# Altium PCB FreidoraAireCukiDigLeds.PcbDoc
Units mil, origin at the board's own origin, x right, y up, seen from the top; angles counter-clockwise.
Board outline 3650 x 2850 mil, 2 copper layers (Top Layer, Bottom Layer); 51 components, 96 nets, 153 pads, 12 vias.
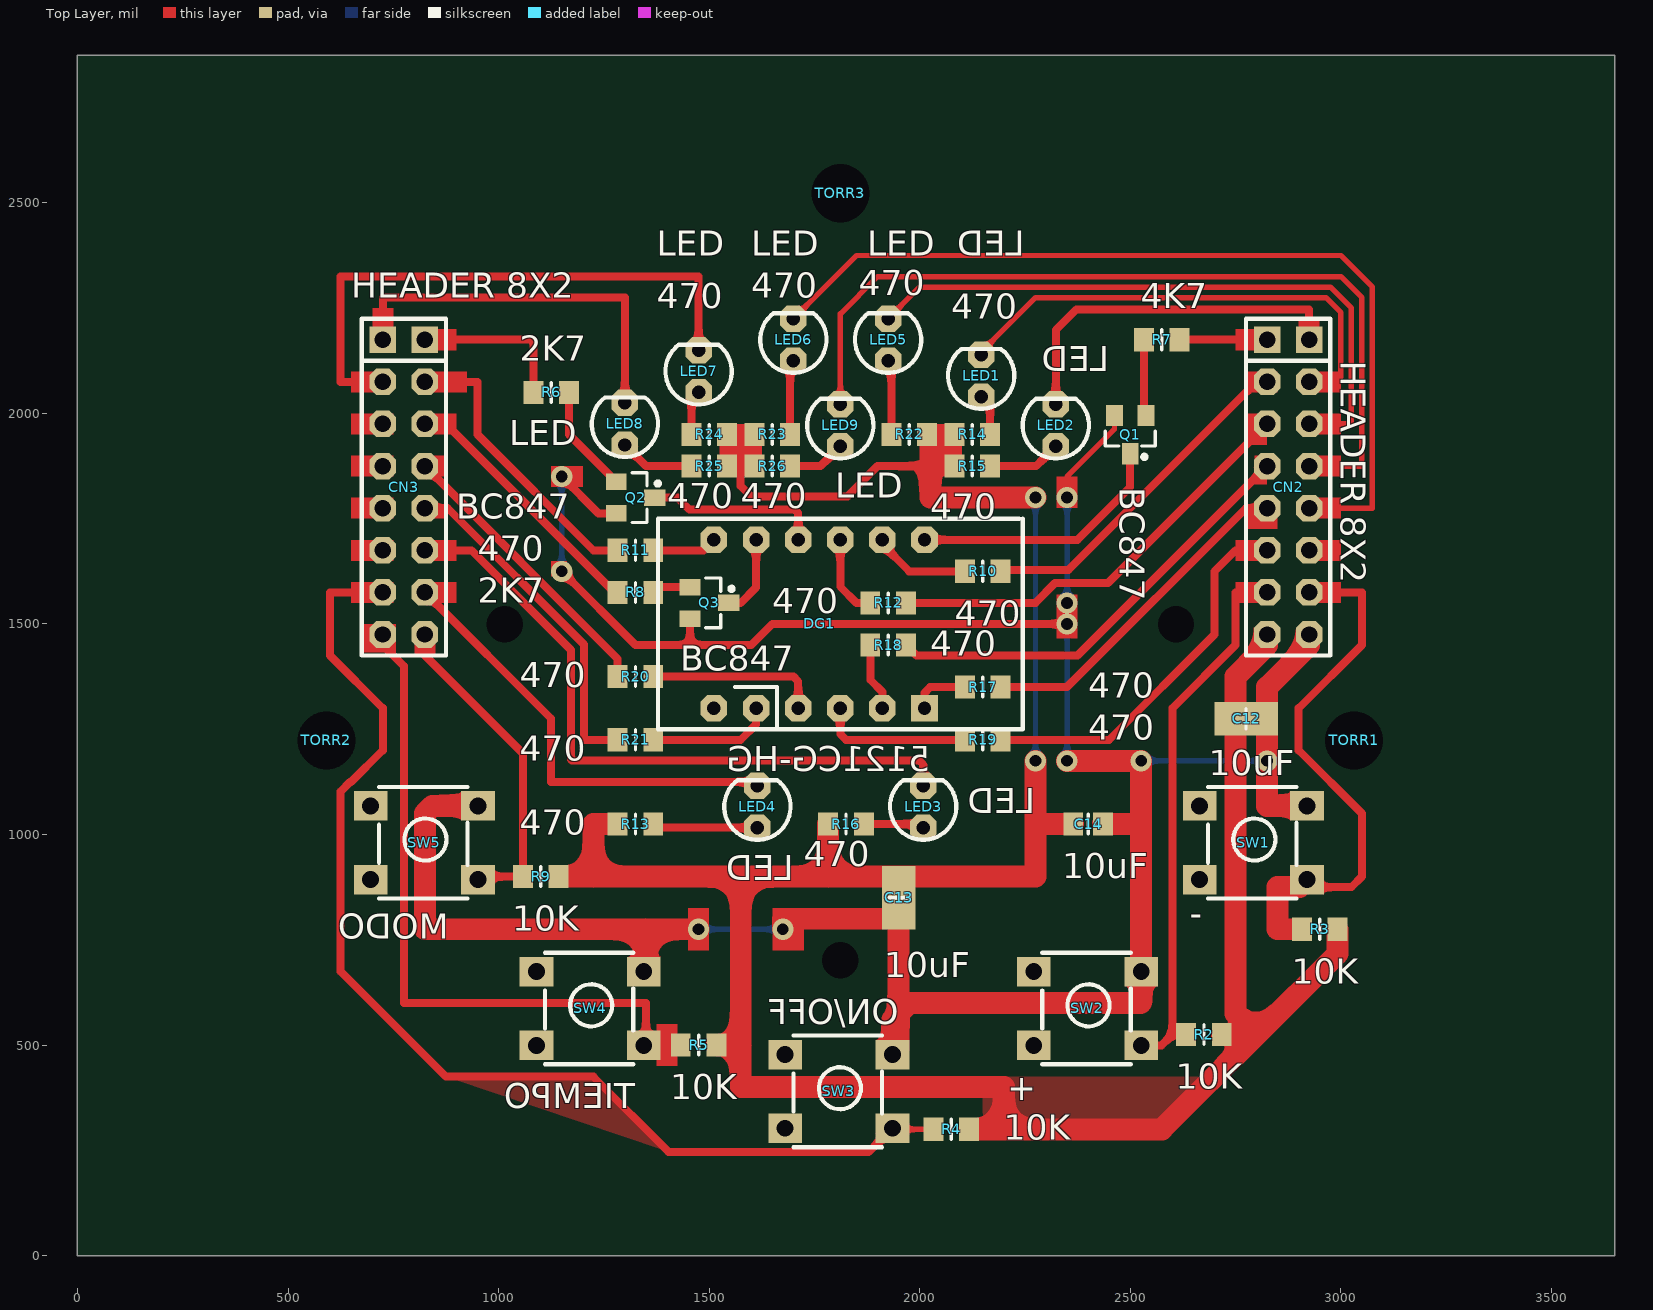
[diagram p0: Top Layer view]
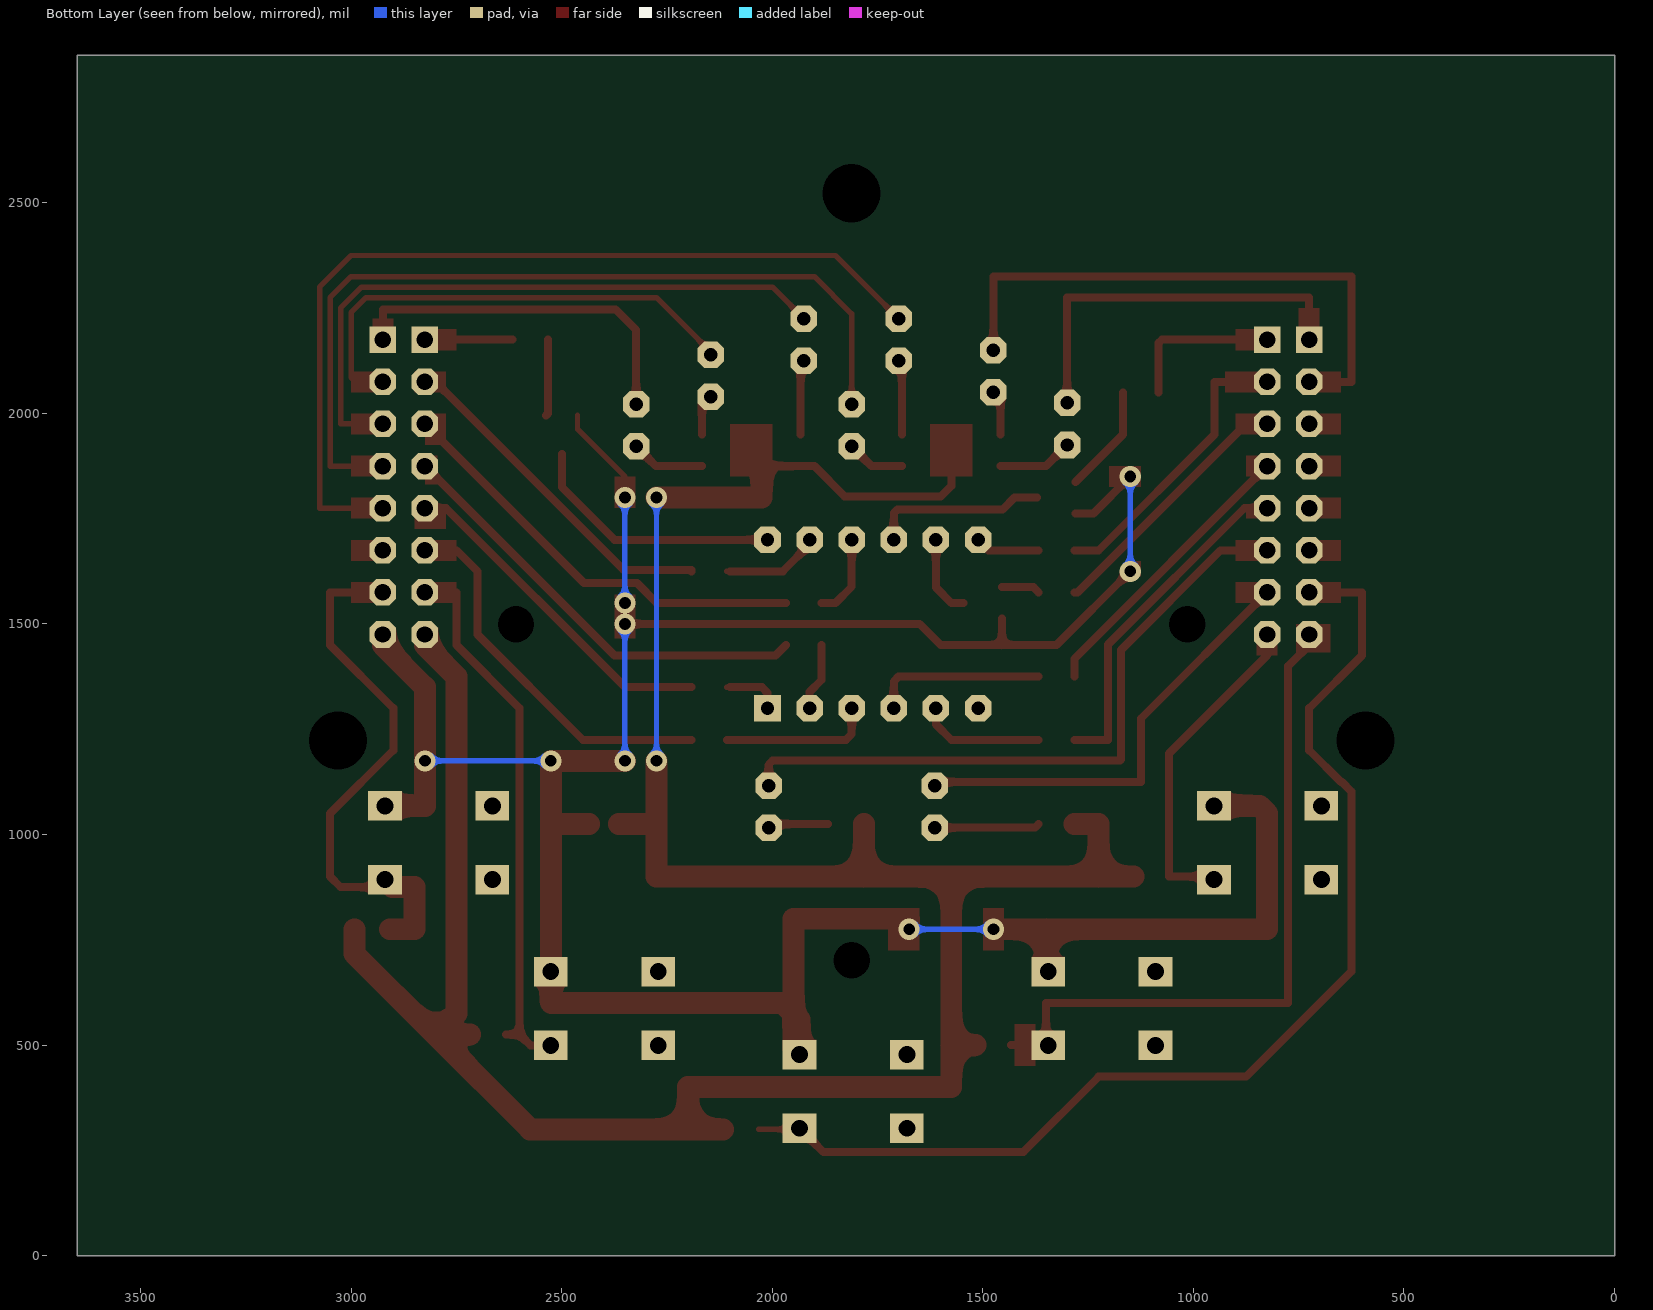
[diagram p1: Bottom Layer view, seen from below]

## Layer stack, top to bottom
Top Solder: solder mask 0.4, Solder Resist, Dk 3.5
Top Layer: signal copper 1.4
Dielectric1: dielectric 12.6, FR-4, Dk 4.8
Bottom Layer: signal copper 1.4
Bottom Solder: solder mask 0.4, Solder Resist, Dk 3.5

## Board outline
0,0 3650,0 3650,2850 0,2850

## Design rules (kind name [scope] priority, off if disabled: settings)
Clearance POLIGONOS [InPoly] p1: gap=20
Clearance [All] p2: gap=12
Clearance Clearance_1 [All] p3 off: gap=10
ComponentClearance [All] p1 off: gap=10 collisioncheckmode=3 verticalgap=10 showdistances=FALSE
FabricationTestPointUsage TestPointUsage [All] p1 off: valid=0 allowmultiple=FALSE
FabricationTestpoint Testpoint [All] p1: side=3 testpointundercomponent=TRUE minsize=40 maxsize=100 preferedsize=60 minholesize=0 maxholesize=40 preferedholesize=32 testpointgrid=1 allowsidetop=TRUE allowsidebottom=TRUE usegrid=TRUE gridtolerance=0.01
HoleSize [All] p1: absolutevalues=TRUE maxlimit=200 minlimit=1 maxpercent=80.000 minpercent=20.000
MinimumSolderMaskSliver [All] p1 off: minsoldermaskwidth=10
PlaneConnect [All] p1: planeconnectstyle=Relief reliefexpansion=20 reliefentries=4 reliefconductorwidth=14 reliefairgap=10
PolygonConnect [All] p1: connectstyle=Relief reliefconductorwidth=10 reliefentries=4 polygonreliefangle="90 Angle" airgapwidth=10
RoomDefinition FreidoraAireCukiDigLeds [InComponentClass('FreidoraAireCukiDigLeds')] p1: confinementstyle=ConfineIn formatcopy=TRUE lockcomponents=FALSE outline -225,-250 3775,-250 3775,2925 -225,2925
RoutingCorners [All] p1: cornerstyle=45-Degree minsetback=25 maxsetback=100
RoutingLayers [All] p1: top layer_v5=FALSE bottom layer_v5=FALSE
RoutingPriority [All] p1: routingpriority=2
RoutingVias [All] p1: holewidth=28 width=50 viastyle="Through Hole" minholewidth=28 minwidth=50 maxholewidth=28 maxwidth=55
ShortCircuit [All] p1 off: allowed=FALSE
SilkToSilkClearance [All] p1 off: silktosilkclearance=10
SilkToSolderMaskClearance SilkscreenOverComponentPads [IsPad] p1 off: minsilkscreentomaskgap=10 clearancetoexposedcopper=TRUE
SolderMaskExpansion [All] p1: expansion=4
Width "Width 39" [All] p1 off: maxlimit=300 minlimit=13 preferedwidth=39
Width "Width 96" [All] p2 off: maxlimit=300 minlimit=12 preferedwidth=96
Width "Width 19" [All] p3: maxlimit=300 minlimit=12 preferedwidth=19
Width "Width 300" [All] p4 off: maxlimit=300 minlimit=10 preferedwidth=300
Width "Width 12" [All] p5 off: maxlimit=300 minlimit=10 preferedwidth=12
Width "Width 65" [All] p6 off: maxlimit=300 minlimit=10 preferedwidth=65
Width "Width 150" [All] p7 off: maxlimit=300 minlimit=10 preferedwidth=150
Width "Width 26" [All] p8 off: maxlimit=300 minlimit=10 preferedwidth=26
Width "Width 13" [All] p9 off: maxlimit=300 minlimit=10 preferedwidth=13
Width "Width 52" [All] p10 off: maxlimit=300 minlimit=10 preferedwidth=52
18 further rules are at their usual default settings.

## Components (designator, comment, footprint, x,y, rotation, side; value= is the part's Value field where it differs from the comment)
C12 "10uF" C-0805_N#1 2775,1275 r180 top
C13 "10uF" C-0805_N#1 1950,850 r90 top
C14 "10uF" C-0805_N#2 2400,1025 r180 top
CN2 "HEADER 8X2" SIP2X8 2825,2175 r90 top
CN3 "HEADER 8X2" SIP2X8 725,2175 r90 top
DG1 "5121CG-HG" DIGIT_3_400 2011.42,1300 r180 top
LED1 "LED" LED3MM#1 2146.06,2089.76 r180 top
LED2 "LED" LED3MM#1 2323.23,1971.65 r180 top
LED3 "LED" LED3MM#1 2008.27,1066.14 r180 top
LED4 "LED" LED3MM#1 1614.57,1066.14 r180 top
LED5 "LED" LED3MM#2 1925,2175 r0 top
LED6 "LED" LED3MM#2 1700,2175 r0 top
LED7 "LED" LED3MM#2 1475,2100 r0 top
LED8 "LED" LED3MM#2 1300,1975 r0 top
LED9 "LED" LED3MM#2 1811.42,1971.65 r0 top
Q1 "BC847" SOT23_BOTTOM 2500,1950 r270 top
Q2 "BC847" SOT23_BOTTOM 1325,1800 r0 top
Q3 "BC847" SOT23_BOTTOM 1500,1550 r0 top
R2 "10K" 0805BOTTOM 2675,525 r0 top
R3 "10K" 0805BOTTOM 2950,775 r0 top
R4 "10K" 0805BOTTOM 2075,300 r0 top
R5 "10K" 0805BOTTOM 1475,500 r0 top
R6 "2K7" R-0805_N_WAVE 1125,2050 r0 top
R7 "4K7" R-0805_N_WAVE 2575,2175 r180 top
R8 "2K7" R-0805_N_WAVE 1325,1575 r0 top
R9 "10K" 0805BOTTOM 1100,900 r0 top
R10 "470" 0805BOTTOM 2150,1625 r0 top
R11 "470" 0805BOTTOM 1325,1675 r180 top
R12 "470" 0805BOTTOM 1925,1550 r0 top
R13 "470" 0805BOTTOM 1325,1025 r180 top
R14 "470" 0805BOTTOM 2125,1950 r180 top
R15 "470" 0805BOTTOM 2125,1875 r180 top
R16 "470" 0805BOTTOM 1825,1025 r180 top
R17 "470" 0805BOTTOM 2150,1350 r180 top
R18 "470" 0805BOTTOM 1925,1450 r180 top
R19 "470" 0805BOTTOM 2150,1225 r180 top
R20 "470" 0805BOTTOM 1325,1375 r0 top
R21 "470" 0805BOTTOM 1325,1225 r0 top
R22 "470" 0805BOTTOM 1975,1950 r0 top
R23 "470" 0805BOTTOM 1650,1950 r180 top
R24 "470" 0805BOTTOM 1500,1950 r0 top
R25 "470" 0805BOTTOM 1500,1875 r0 top
R26 "470" 0805BOTTOM 1650,1875 r180 top
SW1 "-" ZIPPY-TS 2919.68,1068.11 r180 top
SW2 "+" ZIPPY-TS 2525.98,674.41 r180 top
SW3 "ON/OFF" ZIPPY-TS 1935.43,477.56 r180 top
SW4 "TIEMPO" ZIPPY-TS 1344.88,674.41 r180 top
SW5 "MODO" ZIPPY-TS 951.18,1068.11 r180 top
TORR1 "" TORRETA 3031.89,1223.62 r180 top
TORR2 "" TORRETA 590.94,1223.62 r180 top
TORR3 "" TORRETA 1811.42,2522.83 r180 top

## Footprints (in the part's own frame and the unit in brackets; to place one, negate y for a bottom-side part, rotate by r counter-clockwise, add the part's x,y. Pads: shape width x height; smd on the part's side, far side on the other; paste and mask are expansions set on the pad)
0805BOTTOM [mm] "Chip Resistor, Body 2.0x1.2mm, IPC Medium Density"
  rect 1.2x1.4 smd: 1(-1.075,0) 2(1.075,0)
  silkscreen extent 0,-0.6 0,0.6, body extent -1.07,-0.7 1.07,0.7, height 0.7
C-0805_N#1 [mil] "Chip Capacitor, Body 2.0x1.2mm, IPC Medium Density"
  rect 80x80 smd: 1(-35.43,0) 2(35.43,0)
  silkscreen extent 0,-24 0,24, body extent -43,-29 43,29, height 53
C-0805_N#2 [mil] "Chip Capacitor, Body 2.0x1.2mm, IPC Medium Density"
  rect 47.24x55.12 smd: 1(-35.43,0) 2(35.43,0)
  silkscreen extent 0,-24 0,24, body extent -43,-29 43,29, height 53
DIGIT_3_400 [mil] "7 segment single digit 400"
  rect 63x63 hole 32: 1(0,0)
  oct 63x63 hole 32: 2(100,0) 3(200,0) 4(300,0) 5(400,0) 6(500,0) 7(500,-400) 8(400,-400) 9(300,-400) 10(200,-400) 11(100,-400) 12(0,-400)
  silkscreen extent -233,-450 633,50
LED3MM#1 [mil]
  oct 63x63 hole 32: 1(0,50) 2(0,-50)
  silkscreen extent -79,-63 79,79, body extent -79,-66 79,79, height 256
LED3MM#2 [mil]
  oct 63x63 hole 32: 1(0,-50) 2(0,50)
  silkscreen extent -79,-79 79,63, body extent -79,-79 79,66, height 181
R-0805_N_WAVE [mm] "Chip Resistor, Body 2.0x1.2mm, IPC Medium Density, Wave soldering"
  rect 1.2x1.4 smd: 1(-1.075,0) 2(1.075,0)
  silkscreen extent 0,-0.6 0,0.6, body extent -1.1,-0.67 1.1,0.68, height 0.69
SIP2X8 [mil]
  rect 63x63 hole 39: 1(0,0) 2(0,-100)
  oct 63x63 hole 39: 3(-100,0) 4(-100,-100) 5(-200,0) 6(-200,-100) 7(-300,0) 8(-300,-100) 9(-400,0) 10(-400,-100) 11(-500,0) 12(-500,-100) 13(-600,0) 14(-600,-100) 15(-700,0) 16(-700,-100)
  silkscreen extent -750,-150 50,50
SOT23_BOTTOM [mm] "SOT23, 3-Leads, Body 2.9x1.3mm, Pitch 0.95mm, Lead Span 2.3mm - Reverse Pinning, IPC Medium Density"
  rect 1.25x1 smd: 1(-1.15,0.95) 2(-1.15,-0.95)
  rect 1.3x1 smd: 3(1.17,0)
  silkscreen extent -0.2,-1.5 1.47,1.5, body extent -0.7,-1.5 0.7,1.5, height 1.1
TORRETA [mm]
  round 3 hole 3.5: 0(0,0)
ZIPPY-TS [mil]
  rect 80x70 hole 40: 1(0,175) 2(0,0) 3(255,0) 4(255,175)
  silkscreen extent 25,-45 235,220

## Part data
C12 C13 C14: library part CAP, "Non polarized capacitor"
CN2 CN3: "HEADER DE 2 X8"
DG1: library part "DIGITO x 3 400", "Dígito 0.52' cátodo común verde"
Q1 Q2 Q3: "NPN transistor bipolar"
R2 R3 R4 R5 R9 R10 R11 R12 R13 R14 R15 R16 R17 R18 R19 R20 R21 R22 R23 R24 R25 R26: library part RES1, "Resistor"
R6 R7 R8: library part RES, "Resistor"
SW1 SW2 SW3 SW4 SW5: library part TECLA
TORR1 TORR2 TORR3: library part TORRETA

## Free pads (board coordinates)
  round 19.68 hole 86.61: 0(1014.17,1499.21) 0(1811.42,701.97) 0(2608.66,1499.21)

## Via types
v1: diameter 50, hole 28, Top Layer to Bottom Layer, 12 vias

## Nets (pads, with @x,y where several pads share a name; then routed paths per layer and width w, separated by ;. In a path a pad name is that pad's centre, name@x,y a point inside that pad or via, vN(x,y) a via of type N, cw(c..) or ccw(c..) an arc to the next point about the centre after c; other vN are vias at no path point)
A: 
AGND: 
B: 
BAJAR: CN2.14 R3.1 SW1.1 | length 1292.3
  Top Layer w19: SW1.1@2901.57,875 3025,875 3050,900 3050,1050 2900,1200 2900,1300 3050,1450 3050,1575 CN2.14
  Top Layer w52: SW1.1@2901.57,875 2850,875 2850,775 R3.1
BUZZER: 
C: 
D: 
DIG1: DG1.12 Q1.3 | length 619.3
  Top Layer w19: DG1.12 2375,1700 2500,1825 Q1.3
DIG2: DG1.9 Q2.3 | length 419
  Top Layer w19: Q2.3 1425,1800 1453,1772 1703,1772 1711.42,1763.58 DG1.9
DIG3: DG1.8 Q3.3 | length 194
  Top Layer w19: Q3.3 1575,1550 1611.42,1586.42 DG1.8
DIGITO1: CN2.1 R7.1 | length 207.7
  Top Layer w19: R7.1 CN2.1
DIGITO2: CN3.2 R6.1 | length 378.2
  Top Layer w19: CN3.2 1075,2175 1082.68,2167.32 R6.1
DIGITO3: CN3.6 R8.1 | length 623.4
  Top Layer w19: CN3.6 875,1975 1275,1575 R8.1
DP: 
E: 
F: 
FAN: 
G: 
GND: C12.1 C13.1 C14.1 CN2.16 Q1.2 Q2.2 Q3.2 SW1.2 SW2.2 SW3.2 SW4.2 SW5.2 | length 6926.3
  Top Layer w13: v1(2350,1800) 2350,1850 2462.6,1962.6 Q1.2
  Top Layer w19: v1(1150,1625) 1325,1450 1454.72,1450 ; v1(1150,1850) 1237.4,1762.6 Q2.2 ; Q3.2 1454.72,1450 ; v1(2350,1500) 1650,1500 1600,1450 1454.72,1450
  Top Layer w52: SW5.2 843.11,1068.11 825,1050 825,775 1350,775 ; SW4.2 1350,679.53 1350,775 ; v1(1475,775) 1350,775 ; v1(1675,775) 1675,800 1950,800 1950,575 ; v1(2350,1175) v1(2525.98,1175) 2525.98,1025 ; C14.1 2525.98,1025 ; SW1.2 2825,1068.11 v1(2825,1175) 2825,1350 2925,1450 CN2.16 ; 1950,575 1950,492.13 SW3.2 1935.43,560.43 1950,575 ; 1950,575 1975,600 2525,600 2525.98,600.98 SW2.2 2525.98,1025
  Bottom Layer w13: v1(1150,1625) v1(1150,1850) ; v1(1475,775) v1(1675,775) ; v1(2350,1175) v1(2350,1500) ; v1(2350,1550) v1(2350,1800) ; v1(2525.98,1175) v1(2825,1175)
HEAT: 
LED1: 
LED1_DR: CN2.4 LED1.2 | length 1161.9
  Top Layer w13: LED1.2@2146.06,2146.06 2275,2275 2964.64,2275 3000,2239.64 3000,2085.36 2989.64,2075 CN2.4
  Top Layer w19: LED1.2 LED1.2@2146.06,2146.06
LED2: 
LED2_DR: CN2.2 LED2.2 | length 870.5
  Top Layer w19: LED2.2 2323.23,2198.23 2372,2247 2925,2247 CN2.2
LED3: 
LED3_DR: CN3.12 LED3.2 | length 1596.9
  Top Layer w19: CN3.12 935.4,1675 1172,1438.4 1172,1178 1174.06,1175.94 1999.06,1175.94 2008.27,1166.73 LED3.2
LED4: 
LED4_DR: CN3.14 LED4.2 | length 1067.5
  Top Layer w19: CN3.14 1125,1275 1125,1125 1605.71,1125 LED4.2
LED5: 
LED5_DR: CN2.6 LED5.2 | length 1526.8
  Top Layer w13: LED5.2 2000,2300 2975,2300 3025,2250 3025,1975 CN2.6
LED6: 
LED6_DR: CN2.10 LED6.2 | length 2143.2
  Top Layer w13: LED6.2 1850,2375 3000,2375 3075,2300 3075,1775 CN2.10
LED7: 
LED7_DR: CN3.3 LED7.2 | length 1375
  Top Layer w19: CN3.3 625,2075 625,2325 1475,2325 LED7.2
LED8: 
LED8_DR: CN3.1 LED8.2 | length 925
  Top Layer w19: CN3.1 725,2275 1300,2275 LED8.2
LED9: 
LED9_DR: CN2.8 LED9.2 | length 2035.7
  Top Layer w13: LED9.2 1811.42,2236.42 1900,2325 3000,2325 3050,2275 3050,1875 CN2.8
MODO: CN3.16 R9.1 SW5.1 | length 780.7
  Top Layer w19: CN3.16 825,1425 1057.68,1192.32 R9.1 958.07,900 SW5.1
NetC9_1: 
NetDG1_1: DG1.1 R17.2 | length 138.3
  Top Layer w13: R17.2@2100,1350 R17.2
  Top Layer w19: DG1.1 2011.42,1336.42 2025,1350 R17.2@2100,1350
NetDG1_2: DG1.2 R18.2 | length 161.9
  Top Layer w19: R18.2 1882.68,1367.32 1911.42,1338.58 DG1.2
NetDG1_3: DG1.3 R19.2 | length 363.3
  Top Layer w19: DG1.3 1811.42,1238.58 1825,1225 R19.2
NetDG1_4: DG1.4 R20.2 | length 412.4
  Top Layer w19: R20.2 1700,1375 1711.42,1363.58 DG1.4
NetDG1_5: DG1.5 R21.2 | length 297.8
  Top Layer w19: R21.2 1575,1225 1611.42,1261.42 DG1.5
NetDG1_7: DG1.7 R11.1 | length 154.4
  Top Layer w19: R11.1 1486.42,1675 DG1.7
NetDG1_10: DG1.10 R12.1 | length 198.7
  Top Layer w19: DG1.10 1811.42,1588.58 1850,1550 R12.1
NetDG1_11: DG1.11 R10.1 | length 234
  Top Layer w13: R10.1@2100,1625 R10.1
  Top Layer w19: DG1.11 1911.42,1688.58 1975,1625 R10.1@2100,1625
NetJP2_1: 
NetJP2_2: 
NetLED1_1: LED1.1 R14.1 | length 98.6
  Top Layer w19: LED1.1 2167.32,2018.5 R14.1
NetLED2_1: LED2.1 R15.1 | length 175.2
  Top Layer w19: R15.1 2276.57,1875 LED2.1
NetLED3_1: LED3.1 R16.1 | length 144.6
  Top Layer w19: R16.1 1999.41,1025 LED3.1
NetLED4_1: LED4.1 R13.1 | length 250.9
  Top Layer w19: R13.1 1376.18,1016.14 LED4.1
NetLED5_1: LED5.1 R22.1 | length 178.2
  Top Layer w19: LED5.1 1932.68,2117.32 R22.1
NetLED6_1: LED6.1 R23.1 | length 178.2
  Top Layer w19: R23.1 1692.32,2117.32 LED6.1
NetLED7_1: LED7.1 R24.1 | length 107.2
  Top Layer w19: R24.1 1457.68,2032.68 LED7.1
NetLED8_1: LED8.1 R25.1 | length 178.4
  Top Layer w19: LED8.1 1350,1875 R25.1
NetLED9_1: LED9.1 R26.1 | length 138.4
  Top Layer w19: R26.1 1764.76,1875 LED9.1
NetQ1_1: Q1.1 R7.2 | length 181.7
  Top Layer w19: R7.2 2532.68,2000 Q1.1
NetQ2_1: Q2.1 R6.2 | length 259.2
  Top Layer w19: R6.2 1167.32,1949.8 Q2.1
NetQ3_1: Q3.1 R8.2 | length 92.5
  Top Layer w19: R8.2 1379.72,1587.4 Q3.1
NetQ4_1: 
NetQ5_1: 
NetQ6_1: 
NetQ7_1: 
NetQ8_1: 
NetQ9_1: 
NetQ10_1: 
NetQ11_1: 
NetQ12_1: 
NetQ13_1: 
NetQ14_1: 
NetQ15_1: 
NetQ16_1: 
NetQ17_1: 
NetQ18_1: 
NetQ19_1: 
NetQ20_1: 
NTC_10K: 
ONOFF: CN3.13 R4.1 SW3.1 | length 2729.4
  Top Layer w13: SW3.1 1937.99,300 R4.1
  Top Layer w19: CN3.13 600,1575 600,1425 725,1300 725,1200 649.61,1124.61 647.28,1124.61 625,1102.33 625,675 875,425 1000,425 1225,425 1403.94,246.06 1878.93,246.06 SW3.1
RESET: 
SEG_A: CN2.3 R10.2 | length 820.8
  Top Layer w19: R10.2 2192.32,1628 2353,1628 2800,2075 CN2.3
SEG_B: CN3.4 R11.2 | length 696.6
  Top Layer w19: CN3.4 950,2075 950,1950 1225,1675 R11.2
SEG_C: CN3.8 R20.1 | length 689.6
  Top Layer w19: CN3.8 1282.68,1417.32 R20.1
SEG_D: CN2.7 R18.1 | length 1054.4
  Top Layer w19: R18.1 1992.32,1425 2375,1425 CN2.7
SEG_DP: CN2.11 R19.1 | length 906.9
  Top Layer w19: R19.1 2450,1225 2700,1475 2700,1625 2750,1675 CN2.11
SEG_E: CN2.9 R17.1 | length 808.7
  Top Layer w19: R17.1 2350,1350 2775,1775 CN2.9
SEG_F: CN2.5 R12.2 | length 1033.7
  Top Layer w19: R12.2 2274.59,1550 2321.59,1597 2447,1597 CN2.5
SEG_G: CN3.10 R21.1 | length 818
  Top Layer w19: CN3.10 879.24,1775 1203,1451.24 1203,1225 R21.1
SUBIR: CN2.13 R2.1 SW2.1 | length 1304.4
  Top Layer w19: SW2.1 2574.41,499.41 2600,525 ; R2.1 2600,525 ; CN2.13 2750,1575 2750,1450 2600,1300 2600,525
SWDCLK: 
SWDIO: 
TEMPERATURA: 
TIEMPO: CN3.15 R5.1 SW4.1 | length 1659.8
  Top Layer w19: CN3.15 725,1450 775,1400 775,600 1350,600 1350,504.53 1345.47,500 R5.1
VCC: C12.2 C13.2 C14.2 CN2.15 R2.2 R3.2 R4.2 R5.2 R9.2 R13.2 R14.2 R15.2 R16.2 R22.2 R23.2 R24.2 R25.2 R26.2 | length 7027.6
  Top Layer w13: R25.2 R24.2 ; R26.2 R23.2
  Top Layer w19: 1575,1925 1575,1828 1600,1803 1828,1803 1900,1875 2025,1875 R15.2 ; 2275,1037.5 2287.5,1025
  Top Layer w52: R9.2 1225,900 ; R13.2 1225,1025 1225,900 ; R5.2 1575,500 ; 1782.68,900 R16.2 ; 2025,1875 2025,1800 v1(2275,1800) ; R4.2 2200,300 ; v1(2275,1175) 2275,1037.5 2275,900 1575,900 ; 2287.5,1025 C14.2 ; R2.2 2800,525 ; CN2.15 2825,1450 2750,1375 2750,575 2800,525 ; R3.2 2992.32,717.32 2800,525 ; 1225,900 1575,900 ; 1575,500 1575,400 2200,400 2200,300 ; 1575,500 1575,900 ; 2200,300 2575,300 2800,525
  Bottom Layer w13: v1(2275,1175) v1(2275,1800)
pads on no net: CN2.12 CN3.5 CN3.7 CN3.9 CN3.11 DG1.6 SW1.3 SW1.4 SW2.3 SW2.4 SW3.3 SW3.4 SW4.3 SW4.4 SW5.3 SW5.4 TORR1.0 TORR2.0 TORR3.0

## Polygon pours and split planes (outlines as drawn)
VCC on Top Layer "Top Layer-No Net" (solid, pour order 4): 2150,425 2700,425 2575,300 2150,300 2150,425
ONOFF on Top Layer "Top Layer-No Net" (solid, pour order 2): 875,425 1225,425 1400,250 1403.94,246.06

## Other copper
Top Layer:
  rectangle net LED1_DR: 2925,2050 3000,2100
  rectangle net LED5_DR: 2925,1950 3000,2000
  rectangle net LED9_DR: 2925,1850 3000,1900
  rectangle net LED6_DR: 2925,1750 3000,1800
  rectangle: 2925,1650 3000,1700
  rectangle net BAJAR: 2925,1550 3000,1600
  rectangle net SUBIR: 2750,1550 2825,1600
  rectangle net SEG_DP: 2750,1650 2825,1700
  rectangle net SEG_E: 2775,1725 2850,1775
  rectangle net SEG_D: 2794.75,1831.31 2825,1900
  rectangle net SEG_F: 2775,1925 2825,2000
  rectangle net SEG_A: 2775,2050 2850,2100
  rectangle net DIGITO1: 2750,2150 2825,2200
  rectangle net LED2_DR: 2900,2150 2950,2225
  rectangle net GND: 2325,1775 2375,1850
  rectangle net TIEMPO: 1375,450 1425,550
  rectangle net GND: 1450,725 1500,825
  rectangle net GND: 1650,725 1725,825
  rectangle net DIGITO3: 825,1950 900,2000
  rectangle net SEG_C: 825,1850 875,1900
  rectangle net SEG_G: 825,1750 875,1775
  rectangle net LED3_DR: 825,1650 900,1700
  rectangle net LED4_DR: 825,1550 900,1600
  rectangle net MODO: 800,1425 850,1475
  rectangle net TIEMPO: 675,1432.25 756.19,1500
  rectangle net ONOFF: 650,1550 750,1600
  rectangle: 650,1650 750,1700
  rectangle: 650,1750 750,1800
  rectangle: 650,1850 750,1900
  rectangle: 650,1950 750,2000
  rectangle net LED7_DR: 650,2050 725,2100
  rectangle net SEG_B: 825,2050 925,2100
  rectangle net DIGITO2: 825,2150 900,2200
  rectangle net LED8_DR: 700,2150 750,2250
  rectangle net GND: 1125,1612.38 1162.62,1650
  rectangle net GND: 1125,1825 1200,1875
  rectangle net VCC: 1525,1850 1625,1975
  rectangle net VCC: 2000,1850 2100,1975
  rectangle net GND: 2325,1465 2375,1570

## Silkscreen, mask and mechanical layers (free items; w line width, h text height)
Mechanical 4:
  lines w10: 472.83,1050 472.83,2122.83 ; 472.83,1075 ccw(c1348.92,1076.08) 1350,200 ; 472.83,1975 cw(c1210.33,2037.5) 785.81,2643.79 ; 784.06,2640.94 2840.94,2640.94 ; 1300,200 2350,200 ; 2272.83,200 ccw(c2273.92,1076.08) 3150,1075 ; 2837.03,2643.79 cw(c2412.5,2037.5) 3150,1975 ; 3150,1050 3150,2075
Mechanical 13:
  circle w10: c1811.42,2522.83 r68.9
  circle w10: c3031.89,1223.62 r68.9
  circle w10: c590.94,1223.62 r68.9
  circle w10: c590.94,1223.62 r118.11
  circle w10: c3031.89,1223.62 r118.11
  circle w10: c1811.42,2522.83 r118.11
  circle w10: c1811.42,396.85 r39.37
  circle w10: c2401.97,593.7 r39.37
  circle w10: c1220.87,593.7 r39.37
  circle w10: c827.17,987.4 r39.37
  circle w10: c2795.67,987.4 r39.37
  circle w10: c2008.27,1066.14 r39.37
  circle w10: c1614.57,1066.14 r39.37
  circle w10: c1811.42,1971.65 r39.37
  circle w10: c1811.42,1499.21 r797.24
  circle w10: c2608.66,1499.21 r19.68
  circle w10: c1811.42,701.97 r19.68
  circle w10: c1014.17,1499.21 r19.68
  circle w10: c2323.23,1971.65 r39.37
  circle w10: c1299.61,1971.65 r39.37
  circle w10: c2146.06,2089.76 r39.37
  circle w10: c1476.77,2089.76 r39.37
  circle w10: c1929.53,2168.5 r39.37
  circle w10: c1693.31,2168.5 r39.37
  lines w10: 472.83,2122.83 475,2125 ; 748.43,987.4 905.91,987.4 ; 827.17,908.66 827.17,1066.14 ; 1142.13,593.7 1299.61,593.7 ; 1220.87,525 1220.87,675 ; 1675,1499.21 1975,1499.21 ; 1772.05,396.85 1850.79,396.85 ; 1811.42,300 1811.42,475 ; 1811.42,1400 1811.42,1575 ; 2323.23,593.7 2480.71,593.7 ; 2401.97,525 2401.97,653.15 ; 2716.93,987.4 2874.41,987.4 ; 2795.67,908.66 2795.67,1066.14 ; 1368.5,1223.62 2254.33,1223.62 2254.33,1774.8 1368.5,1774.8 1368.5,1223.62